# EAGLE board Arm Board (EAGLE 6.5.0), part 1 of 2
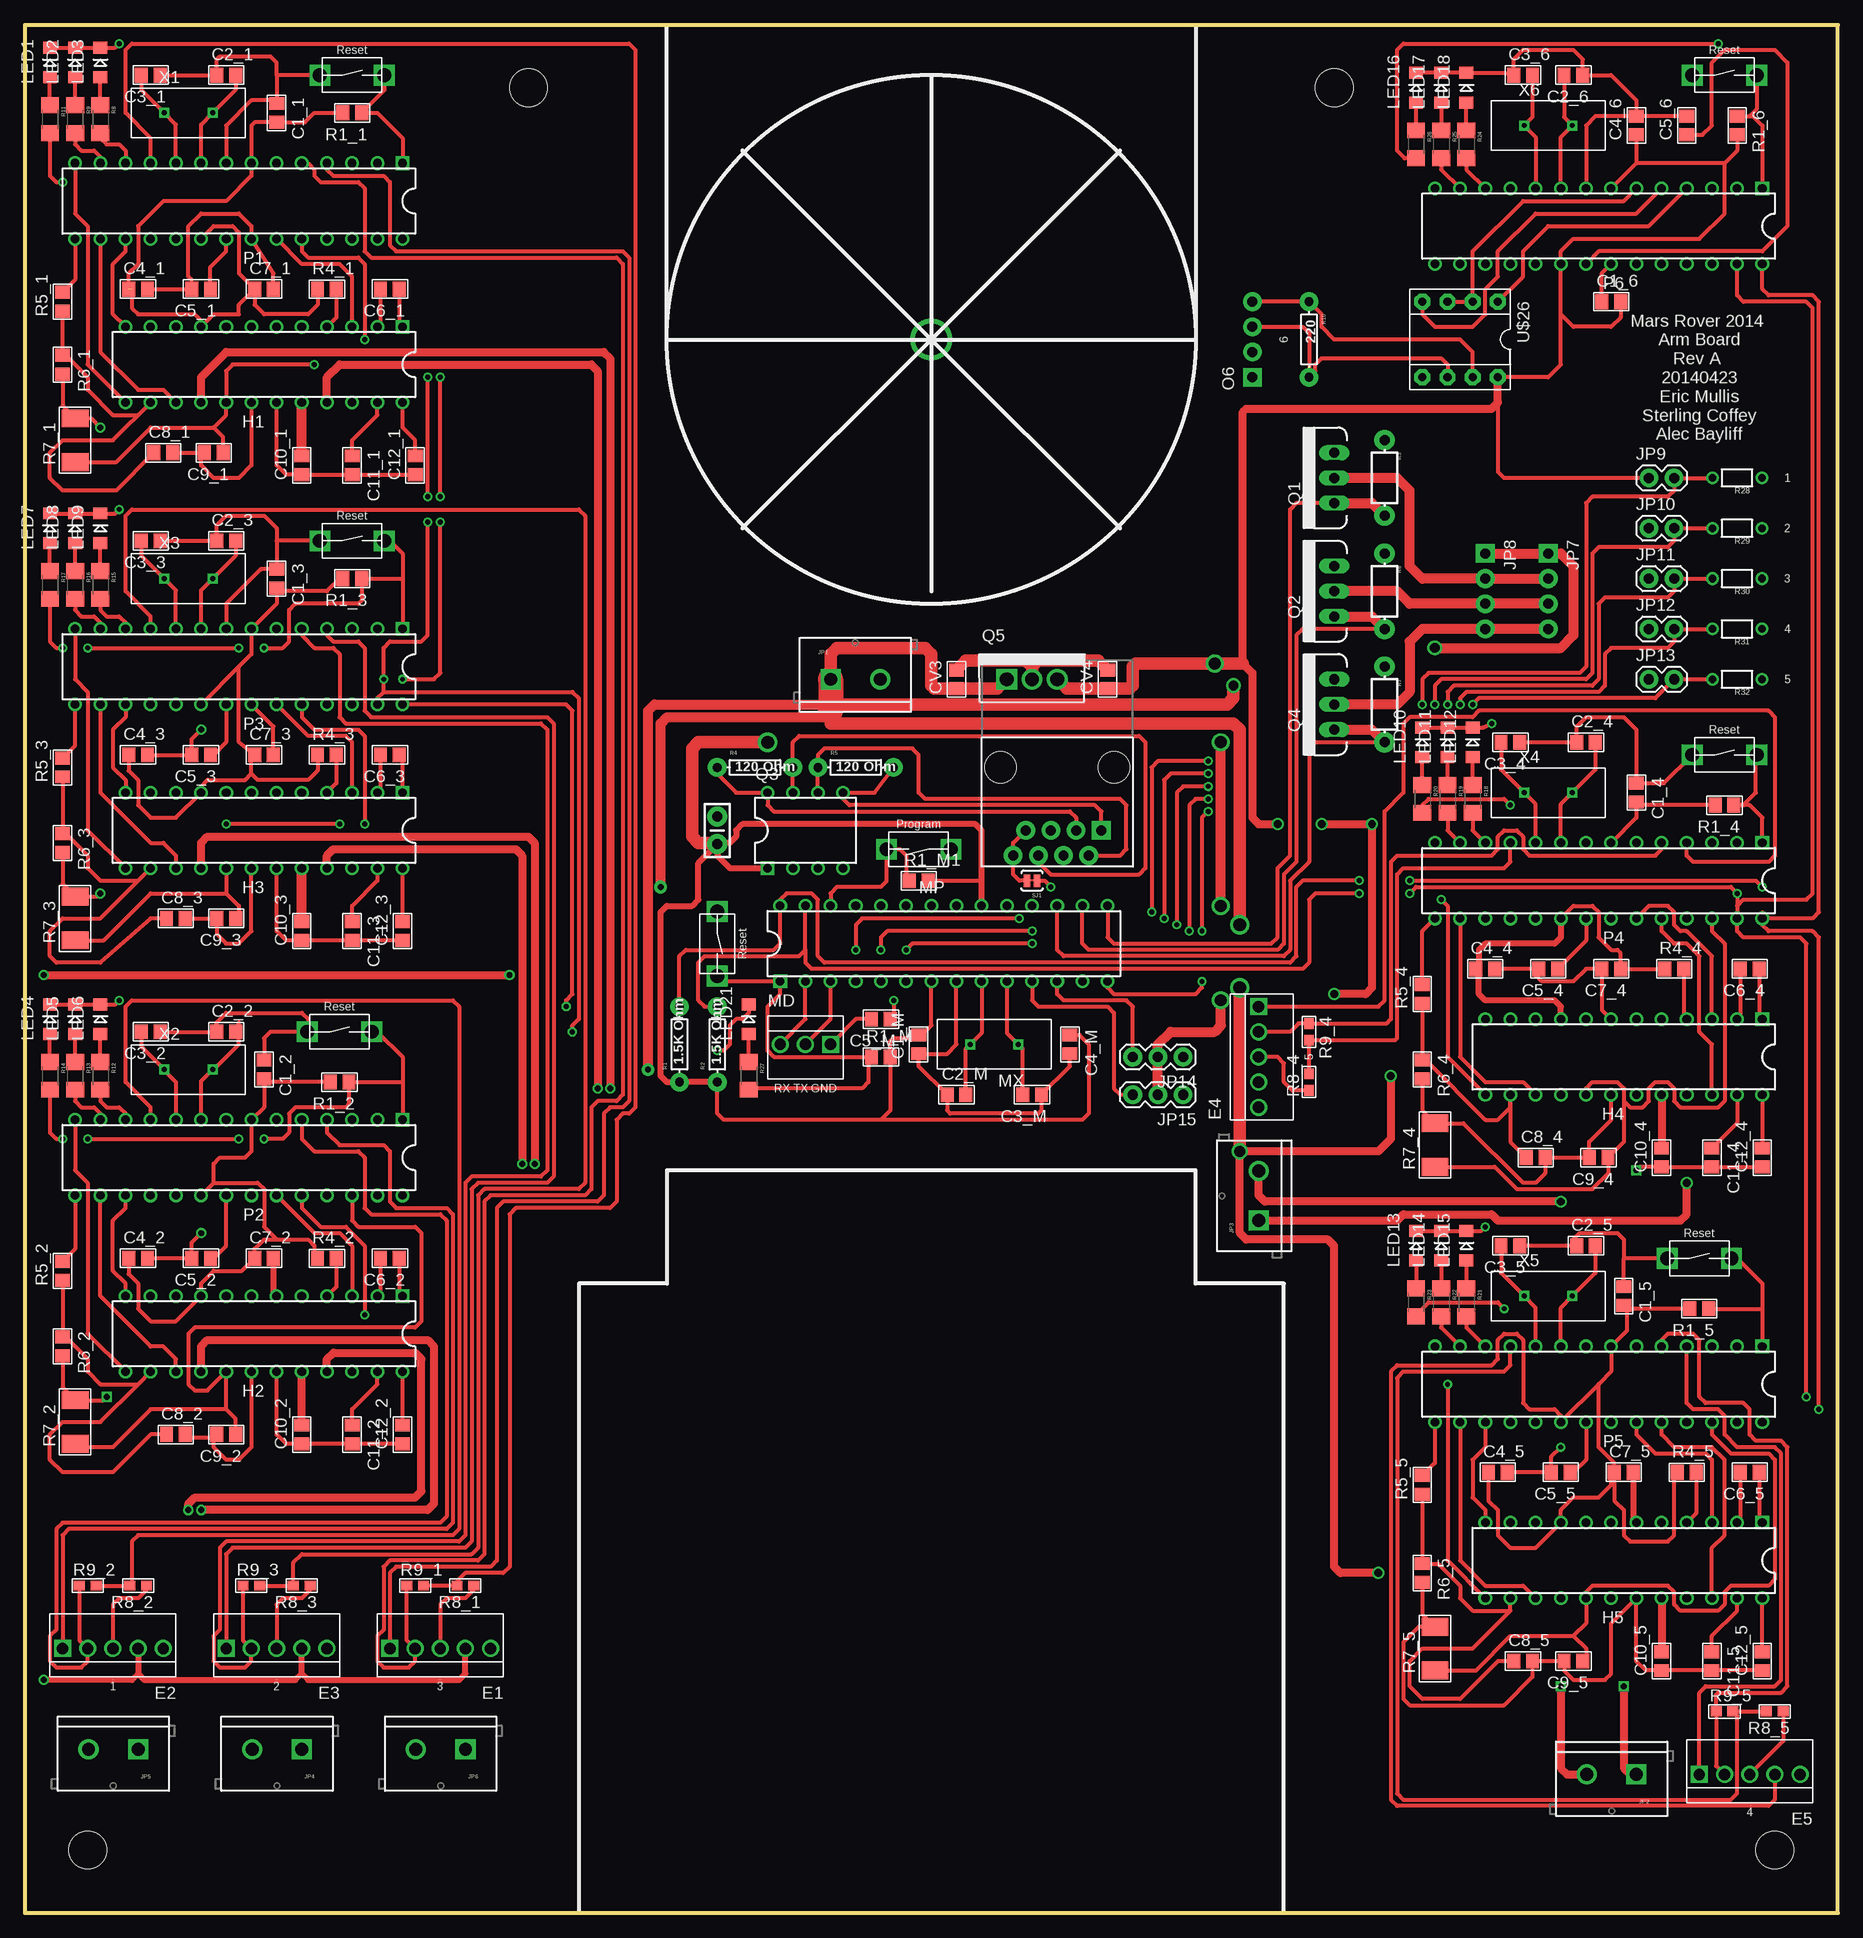
[diagram p0: board, top side]
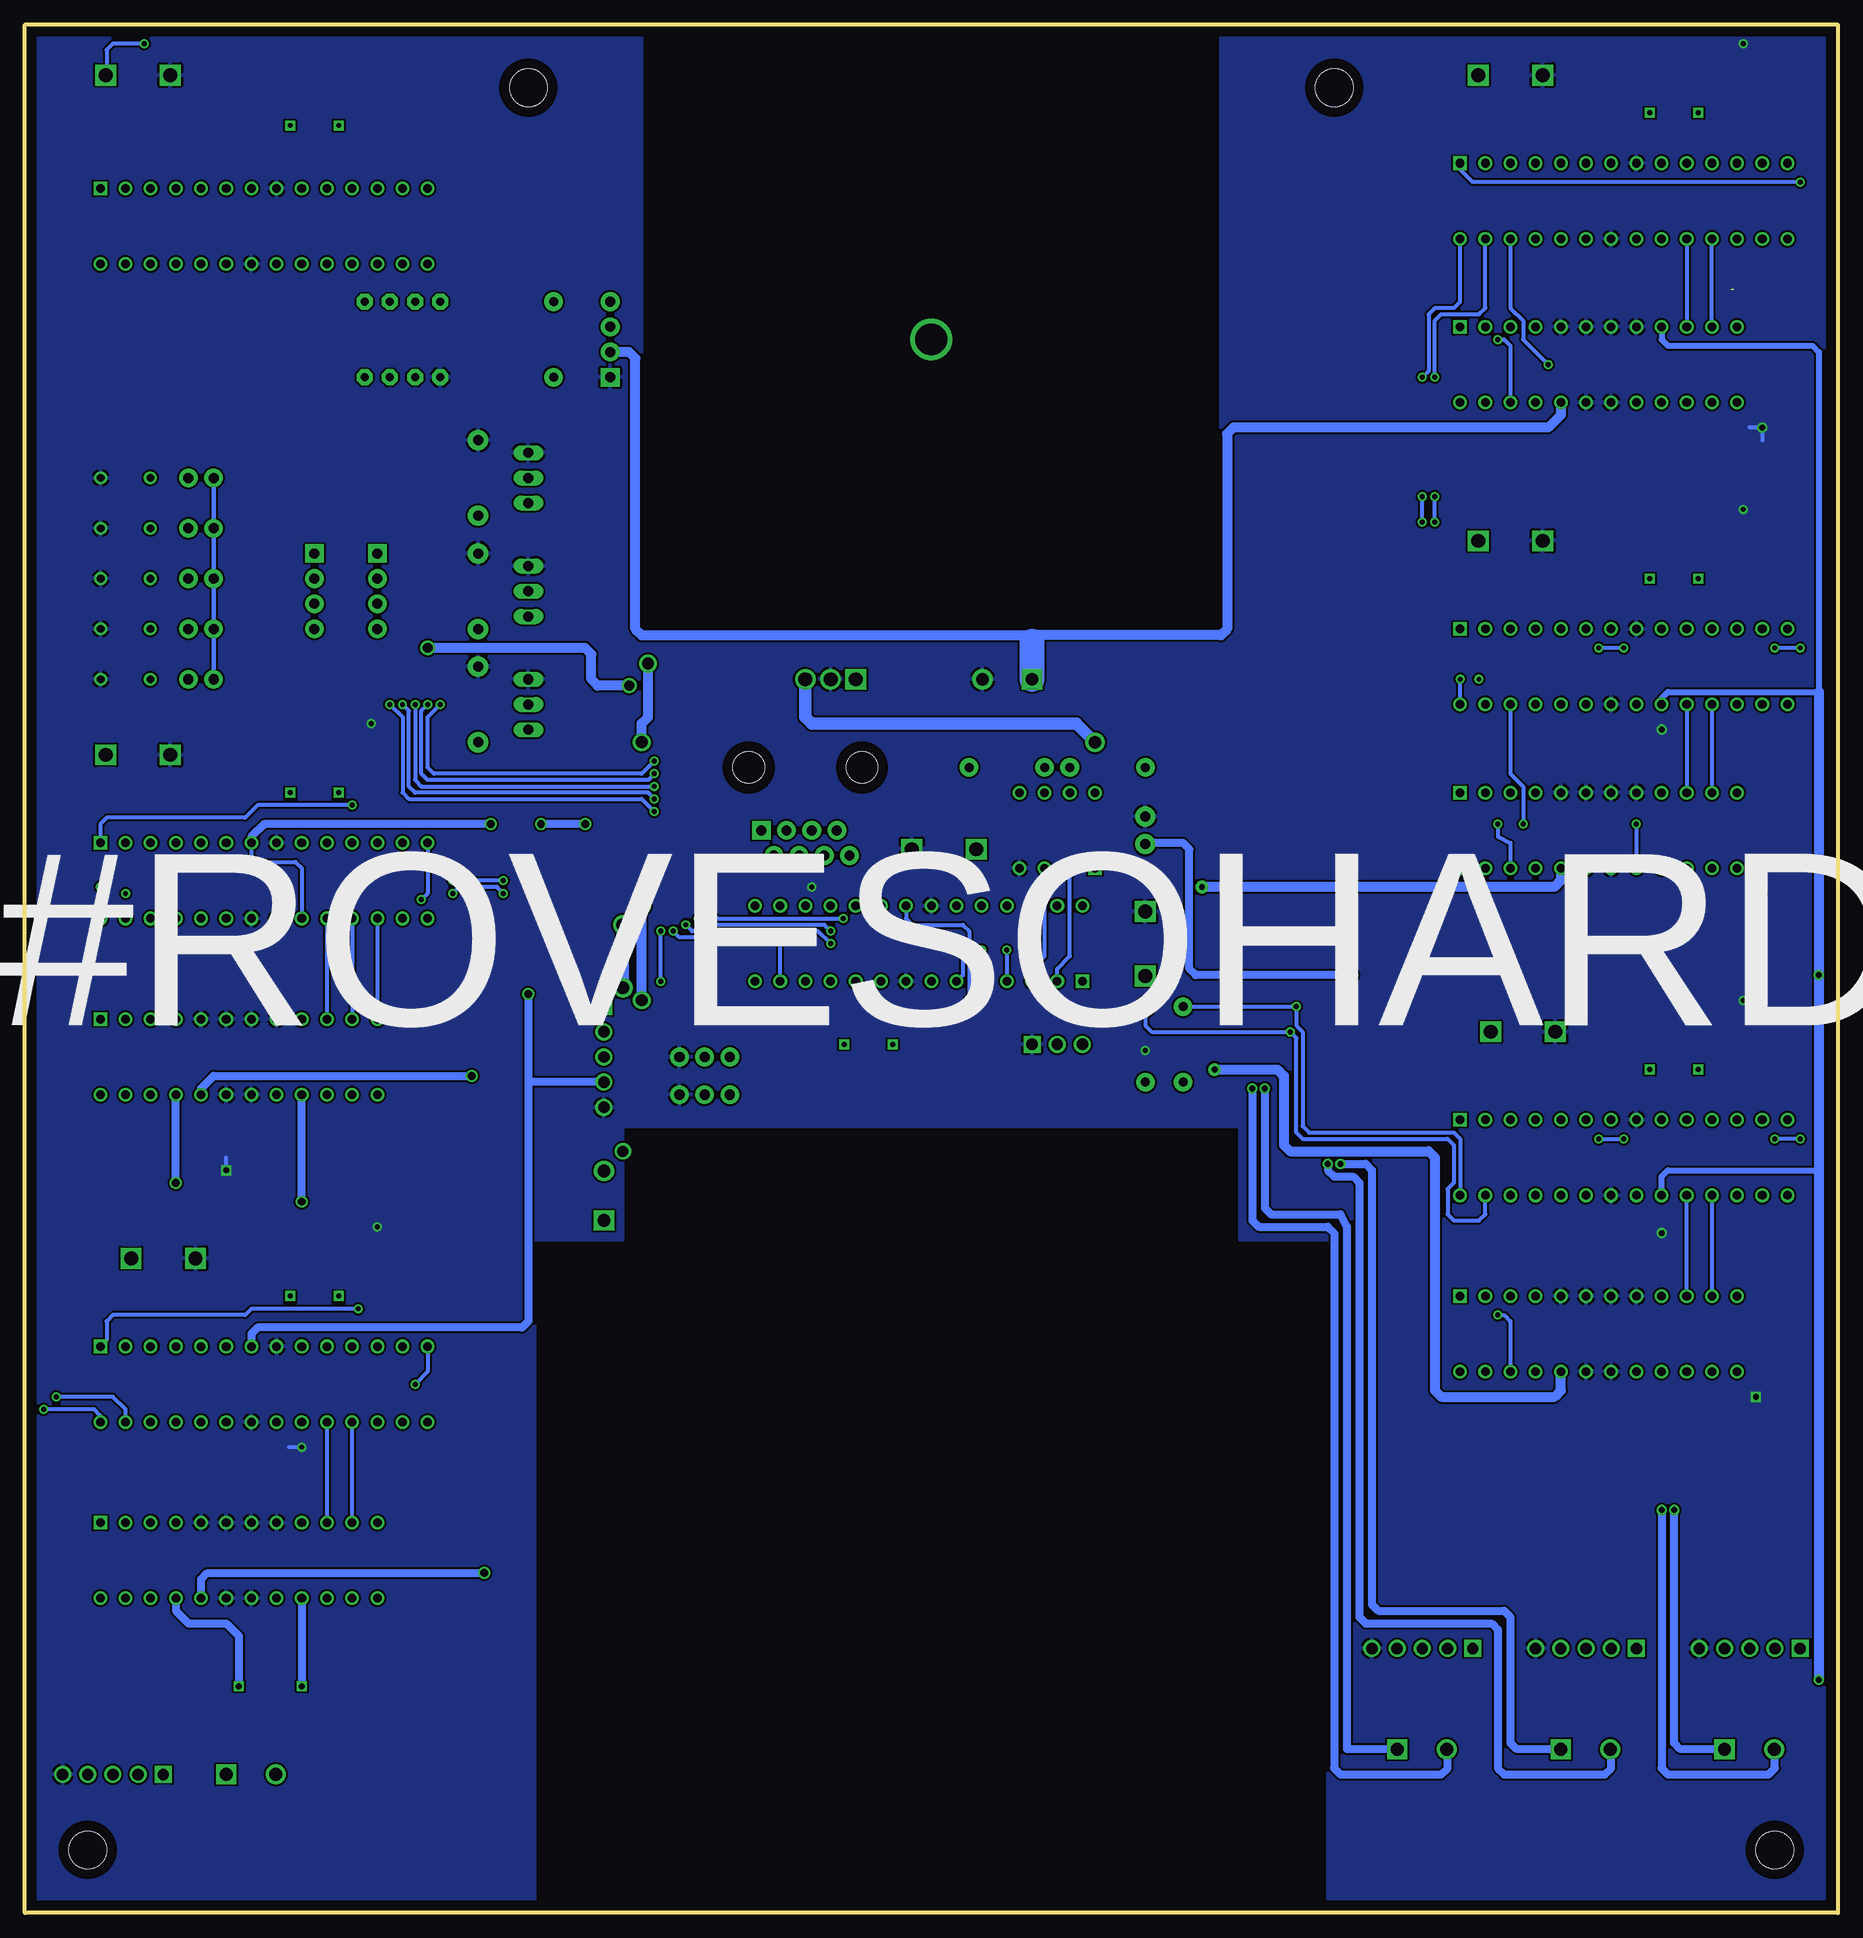
[diagram p1: board, bottom side, seen from below]

Size 182.88 x 190.5 mm. Coordinates in mm from the lower left corner, seen from the top.
Outline: 182.88,0 182.88,190.5 0,190.5 0,0 182.88,0
Copper layers (1*16): Top 0.035mm / dielectric 1.5mm / Bottom 0.035mm
Design rules "default *": minimum track width 10mil, minimum drill 15mil, track to track 8mil, track to pad 8mil, pad to pad 8mil, via to via 8mil, smd to smd 8mil, copper to edge 40mil, drill to drill 8mil, minimum pad ring 10mil, minimum via ring 8mil, stop-mask expansion 4mil, vias tented up to drill 0mil, thermal gap 10mil
Holes 3.81 mm at 50.8,184.15 132.08,184.15 176.53,6.35 6.35,6.35

## Footprints (pad centres in the part's own frame; a part is rotated, then mirrored left to right if it is on the bottom)
C_0805 = smd 1.3 x 1.5: 1 -0.95,0; 2 0.95,0
CAP-PTH-SMALL-KIT = drill 1.016 pad 2.032: 1 -1.397,0; 2 1.397,0
J_MTA100_5P = drill 1.143 square: 1 5.08,0 | drill 1.143: 2 2.54,0; 3 0,0; 4 -2.54,0; 5 -5.08,0
DIP24 = drill 0.864 square: 1 -16.51,-3.81 | drill 0.864: 2 -13.97,-3.81; 3 -11.43,-3.81; 4 -8.89,-3.81; 5 -6.35,-3.81; 6 -3.81,-3.81; 7 -1.27,-3.81; 8 1.27,-3.81; 9 3.81,-3.81; 10 6.35,-3.81; 11 8.89,-3.81; 12 11.43,-3.81; 13 11.43,3.81; 14 8.89,3.81; 15 6.35,3.81; 16 3.81,3.81; 17 1.27,3.81; 18 -1.27,3.81; 19 -3.81,3.81; 20 -6.35,3.81; 21 -8.89,3.81; 22 -11.43,3.81; 23 -13.97,3.81; 24 -16.51,3.81
J_TOGGLE = drill 1.4 square: P$1 -3.25,0; P$2 3.25,0
SCREWTERMINAL-5MM-2 = drill 1.3 pad 2.032 square: 1 0,0 | drill 1.3 pad 2.032: 2 5,0
1X04_NO_SILK = drill 1.016 pad 1.88 square: 1 0,0 | drill 1.016 pad 1.88: 2 2.54,0; 3 5.08,0; 4 7.62,0
1X02 = drill 1.016 pad 1.88: 1 0,0; 2 2.54,0
1X03 = drill 1.016 pad 1.88: 1 0,0; 2 2.54,0; 3 5.08,0
LED-1206 = smd 1.2 x 1.4: A -1.5,0; C 1.5,0
J_MTA100_3P = drill 1.143 square: 1 2.54,0 | drill 1.143: 2 0,0; 3 -2.54,0
DIP28 = drill 0.864 square: 1 -16.51,-3.81 | drill 0.864: 2 -13.97,-3.81; 3 -11.43,-3.81; 4 -8.89,-3.81; 5 -6.35,-3.81; 6 -3.81,-3.81; 7 -1.27,-3.81; 8 1.27,-3.81; 9 3.81,-3.81; 10 6.35,-3.81; 11 8.89,-3.81; 12 11.43,-3.81; 13 13.97,-3.81; 14 16.51,-3.81; 15 16.51,3.81; 16 13.97,3.81; 17 11.43,3.81; 18 8.89,3.81; 19 6.35,3.81; 20 3.81,3.81; 21 1.27,3.81; 22 -1.27,3.81; 23 -3.81,3.81; 24 -6.35,3.81; 25 -8.89,3.81; 26 -11.43,3.81; 27 -13.97,3.81; 28 -16.51,3.81
HC-49 = drill 0.5 square: P$1 -2.44,0; P$2 2.44,0
TO220V = drill 1.016 long: 1 -2.54,0; 2 0,0; 3 2.54,0
DIP8 = drill 0.864 square: 1 -3.81,-3.81 | drill 0.864: 2 -1.27,-3.81; 3 1.27,-3.81; 4 3.81,-3.81; 5 3.81,3.81; 6 1.27,3.81; 7 -1.27,3.81; 8 -3.81,3.81
TO-220 = drill 1.397 square: 1 -2.54,0 | drill 1.397: 2 0,0; 3 2.54,0
AXIAL-0.3 = drill 0.9 pad 1.88: P$1 -3.81,0; P$2 3.81,0
R_0805 = smd 1.3 x 1.5: 1 -0.95,0; 2 0.95,0
AXIAL-0.3-KIT = drill 1.016 pad 2.032: P$1 -3.81,0; P$2 3.81,0
R_2010 = smd 1.8 x 2.7: 1 -2.2,0; 2 2.2,0
1206 = smd 1.6 x 1.8: 1 -1.4,0; 2 1.4,0
R_0603 = smd 1.1 x 1: 1 -0.85,0; 2 0.85,0
AXIAL-0.3EZ = drill 0.9 pad 1.88: P$1 -3.81,0; P$2 3.81,0
1/6W-RES = drill 0.762: 1 -2.5,0; 2 2.5,0
SJ_2S-TRACE = smd 0.635 x 1.27: 1 -0.508,0; 2 0.508,0
RJ45-8 = drill 1 pad 1.88 square: 1 -4.445,6.35 | drill 1 pad 1.88: 2 -3.175,8.89; 3 -1.905,6.35; 4 -0.635,8.89; 5 0.635,6.35; 6 1.905,8.89; 7 3.175,6.35; 8 4.445,8.89 | hole 3.2: -5.715,0; 5.715,0
DIL08 = drill 0.813 pad 1.6 octagon: 1 -3.81,-3.81; 2 -1.27,-3.81; 3 1.27,-3.81; 4 3.81,-3.81; 5 3.81,3.81; 6 1.27,3.81; 7 -1.27,3.81; 8 -3.81,3.81

## Placement (x,y rotation side)
C1_1  [C_0805]  25.4,181.61 270 top
C1_2  [C_0805]  24.13,85.09 270 top
C1_3  [C_0805]  25.4,134.62 270 top
C1_4  [C_0805]  162.56,113.03 270 top
C1_5  [C_0805]  161.29,62.23 270 top
C1_6  [C_0805]  160.02,162.56 0 top
C1_M  [C_0805]  90.17,87.63 90 top
C2_1  15pF  [C_0805]  20.32,185.42 0 top
C2_2  15pF  [C_0805]  20.32,88.9 0 top
C2_3  15pF  [C_0805]  20.32,138.43 0 top
C2_4  15pF  [C_0805]  157.48,118.11 0 top
C2_5  15pF  [C_0805]  157.48,67.31 0 top
C2_6  15pF  [C_0805]  156.21,185.42 180 top
C2_M  15pF  [C_0805]  93.98,82.55 0 top
C3_1  [C_0805]  12.7,185.42 180 top
C3_2  [C_0805]  12.7,88.9 180 top
C3_3  [C_0805]  12.7,138.43 180 top
C3_4  [C_0805]  149.86,118.11 180 top
C3_5  [C_0805]  149.86,67.31 180 top
C3_6  [C_0805]  151.13,185.42 0 top
C3_M  [C_0805]  101.6,82.55 180 top
C4_1  [C_0805]  11.43,163.83 0 top
C4_2  [C_0805]  11.43,66.04 0 top
C4_3  [C_0805]  11.43,116.84 0 top
C4_4  [C_0805]  147.32,95.25 0 top
C4_5  [C_0805]  148.59,44.45 0 top
C4_6  [C_0805]  162.56,180.34 90 top
C4_M  [C_0805]  105.41,87.63 270 top
C5_1  [C_0805]  17.78,163.83 180 top
C5_2  [C_0805]  17.78,66.04 180 top
C5_3  [C_0805]  17.78,116.84 180 top
C5_4  [C_0805]  153.67,95.25 180 top
C5_5  [C_0805]  154.94,44.45 180 top
C5_6  [C_0805]  167.64,180.34 90 top
C5_M  [C_0805]  86.36,90.17 180 top
C6_1  0.22uF  [C_0805]  36.83,163.83 180 top
C6_2  0.22uF  [C_0805]  36.83,66.04 180 top
C6_3  0.22uF  [C_0805]  36.83,116.84 180 top
C6_4  0.22uF  [C_0805]  173.99,95.25 180 top
C6_5  0.22uF  [C_0805]  173.99,44.45 180 top
C7_1  [C_0805]  24.13,163.83 0 top
C7_2  [C_0805]  24.13,66.04 0 top
C7_3  [C_0805]  24.13,116.84 0 top
C7_4  [C_0805]  160.02,95.25 180 top
C7_5  [C_0805]  161.29,44.45 0 top
C8_1  0.1uF  [C_0805]  13.97,147.32 0 top
C8_2  0.1uF  [C_0805]  15.24,48.26 0 top
C8_3  0.1uF  [C_0805]  15.24,100.33 0 top
C8_4  0.1uF  [C_0805]  152.4,76.2 0 top
C8_5  0.1uF  [C_0805]  151.13,25.4 0 top
C9_1  [C_0805]  19.05,147.32 180 top
C9_2  [C_0805]  20.32,48.26 180 top
C9_3  [C_0805]  20.32,100.33 180 top
C9_4  [C_0805]  158.75,76.2 180 top
C9_5  [C_0805]  156.21,25.4 180 top
C10  .1uF  [CAP-PTH-SMALL-KIT]  69.85,109.22 90 top
C10_1  [C_0805]  27.94,146.05 90 top
C10_2  [C_0805]  27.94,48.26 90 top
C10_3  [C_0805]  27.94,99.06 90 top
C10_4  [C_0805]  165.1,76.2 90 top
C10_5  [C_0805]  165.1,25.4 90 top
C11_1  [C_0805]  33.02,146.05 270 top
C11_2  [C_0805]  33.02,48.26 270 top
C11_3  [C_0805]  33.02,99.06 270 top
C11_4  [C_0805]  170.18,76.2 270 top
C11_5  [C_0805]  170.18,25.4 270 top
C12_1  [C_0805]  39.37,146.05 90 top
C12_2  [C_0805]  38.1,48.26 90 top
C12_3  [C_0805]  38.1,99.06 90 top
C12_4  [C_0805]  175.26,76.2 90 top
C12_5  [C_0805]  175.26,25.4 90 top
CV3  [C_0805]  93.98,124.46 90 top
CV4  [C_0805]  109.22,124.46 90 top
E1  [J_MTA100_5P]  41.91,26.67 180 top
E2  [J_MTA100_5P]  8.89,26.67 180 top
E3  [J_MTA100_5P]  25.4,26.67 180 top
E4  [J_MTA100_5P]  124.46,86.36 90 top
E5  [J_MTA100_5P]  173.99,13.97 180 top
H1  A3959  [DIP24]  21.59,156.21 180 top
H2  A3959  [DIP24]  21.59,58.42 180 top
H3  A3959  [DIP24]  21.59,109.22 180 top
H4  A3959  [DIP24]  158.75,86.36 180 top
H5  A3959  [DIP24]  158.75,35.56 180 top
J6  J_MC32857  [J_TOGGLE]  171.45,185.42 0 top
JP1  M025MM  [SCREWTERMINAL-5MM-2]  81.28,124.46 0 top
JP2  M025MM  [SCREWTERMINAL-5MM-2]  162.56,13.97 180 top
JP3  M025MM  [SCREWTERMINAL-5MM-2]  124.46,69.85 90 top
JP4  M025MM  [SCREWTERMINAL-5MM-2]  27.94,16.51 180 top
JP5  M025MM  [SCREWTERMINAL-5MM-2]  11.43,16.51 180 top
JP6  M025MM  [SCREWTERMINAL-5MM-2]  44.45,16.51 180 top
JP7  [1X04_NO_SILK]  153.67,137.16 270 top
JP8  [1X04_NO_SILK]  147.32,137.16 270 top
JP9  M02PTH  [1X02]  163.83,144.78 0 top
JP10  M02PTH  [1X02]  163.83,139.7 0 top
JP11  M02PTH  [1X02]  163.83,134.62 0 top
JP12  M02PTH  [1X02]  163.83,129.54 0 top
JP13  M02PTH  [1X02]  163.83,124.46 0 top
JP14  [1X03]  116.84,86.36 180 top
JP15  [1X03]  116.84,82.55 180 top
LED1  [LED-1206]  2.54,186.69 90 top
LED2  [LED-1206]  5.08,186.69 90 top
LED3  [LED-1206]  7.62,186.69 90 top
LED4  [LED-1206]  2.54,90.17 90 top
LED5  [LED-1206]  5.08,90.17 90 top
LED6  [LED-1206]  7.62,90.17 90 top
LED7  [LED-1206]  2.54,139.7 90 top
LED8  [LED-1206]  5.08,139.7 90 top
LED9  [LED-1206]  7.62,139.7 90 top
LED10  [LED-1206]  140.97,118.11 90 top
LED11  [LED-1206]  143.51,118.11 90 top
LED12  [LED-1206]  146.05,118.11 90 top
LED13  [LED-1206]  140.34,67.31 90 top
LED14  [LED-1206]  142.88,67.31 90 top
LED15  [LED-1206]  145.41,67.31 90 top
LED16  [LED-1206]  140.34,184.15 90 top
LED17  [LED-1206]  142.88,184.15 90 top
LED18  [LED-1206]  145.41,184.15 90 top
LED21  [LED-1206]  73.03,90.17 90 top
MD  [J_MTA100_3P]  78.74,87.63 0 top
MP  ATMEGA328P  [DIP28]  92.71,97.79 0 top
MS  J_MC32857  [J_TOGGLE]  69.85,97.79 270 top
MS1  J_MC32857  [J_TOGGLE]  90.17,107.31 180 top
MX  HC49S  [HC-49]  97.79,87.63 180 top
O6  [1X04_NO_SILK]  123.83,154.94 90 top
P1  ATMEGA328P  [DIP28]  21.59,172.72 180 top
P2  ATMEGA328P  [DIP28]  21.59,76.2 180 top
P3  ATMEGA328P  [DIP28]  21.59,125.73 180 top
P4  ATMEGA328P  [DIP28]  158.75,104.14 180 top
P5  ATMEGA328P  [DIP28]  158.75,53.34 180 top
P6  ATMEGA328P  [DIP28]  158.75,170.18 180 top
Q1  MOSFET-NCHANNELFQP30N06L  [TO220V]  132.08,144.78 90 top
Q2  MOSFET-NCHANNELFQP30N06L  [TO220V]  132.08,133.35 90 top
Q3  Q_LTC490  [DIP8]  78.74,109.22 0 top
Q4  MOSFET-NCHANNELFQP30N06L  [TO220V]  132.08,121.92 90 top
Q5  LDO  [TO-220]  101.6,124.46 0 top
R1  1.5K Ohm  [AXIAL-0.3]  66.04,87.63 90 top
R1_1  200  [R_0805]  33.02,181.61 180 top
R1_2  200  [R_0805]  31.75,83.82 180 top
R1_3  200  [R_0805]  33.02,134.62 180 top
R1_4  200  [R_0805]  171.45,111.76 180 top
R1_5  200  [R_0805]  168.91,60.96 180 top
R1_6  200  [R_0805]  172.72,180.34 270 top
R1_M  200  [R_0805]  86.36,86.36 0 top
R1_M1  200  [R_0805]  90.17,104.14 0 top
R2  1.5K Ohm  [AXIAL-0.3]  69.85,87.63 90 top
R3  [AXIAL-0.3-KIT]  137.16,144.78 270 top
R4  120 Ohm  [AXIAL-0.3]  73.66,115.57 0 top
R4_1  51k  [R_0805]  30.48,163.83 0 top
R4_2  51k  [R_0805]  30.48,66.04 0 top
R4_3  51k  [R_0805]  30.48,116.84 0 top
R4_4  51k  [R_0805]  166.37,95.25 0 top
R4_5  51k  [R_0805]  167.64,44.45 0 top
R5  120 Ohm  [AXIAL-0.3]  83.82,115.57 0 top
R5_1  1k  [R_0805]  3.81,162.56 90 top
R5_2  1k  [R_0805]  3.81,64.77 90 top
R5_3  1k  [R_0805]  3.81,115.57 90 top
R5_4  1k  [R_0805]  140.97,92.71 90 top
R5_5  1k  [R_0805]  140.97,43.18 90 top
R6  [AXIAL-0.3-KIT]  137.16,133.35 270 top
R6_1  10k  [R_0805]  3.81,156.21 270 top
R6_2  10k  [R_0805]  3.81,57.15 270 top
R6_3  10k  [R_0805]  3.81,107.95 270 top
R6_4  10k  [R_0805]  140.97,85.09 270 top
R6_5  10k  [R_0805]  140.97,34.29 270 top
R7  [AXIAL-0.3-KIT]  137.16,121.92 270 top
R7_1  [R_2010]  5.08,148.59 90 top
R7_2  [R_2010]  5.08,49.53 90 top
R7_3  [R_2010]  5.08,100.33 90 top
R7_4  [R_2010]  142.24,77.47 90 top
R7_5  [R_2010]  142.24,26.67 90 top
R8  [1206]  7.62,180.97 270 top
R8_1  [R_0603]  44.45,33.02 180 top
R8_2  [R_0603]  11.43,33.02 180 top
R8_3  [R_0603]  27.94,33.02 180 top
R8_4  [R_0603]  129.54,83.82 90 top
R8_5  [R_0603]  176.53,20.32 180 top
R9  [1206]  5.08,180.97 270 top
R9_1  [R_0603]  39.37,33.02 0 top
R9_2  [R_0603]  6.35,33.02 0 top
R9_3  [R_0603]  22.86,33.02 0 top
R9_4  [R_0603]  129.54,88.9 270 top
R9_5  [R_0603]  171.45,20.32 0 top
R10  220  [AXIAL-0.3EZ]  129.54,158.75 270 top
R11  [1206]  2.54,180.97 270 top
R12  [1206]  7.62,84.45 270 top
R13  [1206]  5.08,84.45 270 top
R14  [1206]  2.54,84.45 270 top
R15  [1206]  7.62,133.99 270 top
R16  [1206]  5.08,133.99 270 top
R17  [1206]  2.54,133.99 270 top
R18  [1206]  146.05,112.39 270 top
R19  [1206]  143.51,112.39 270 top
R20  [1206]  140.97,112.39 270 top
R21  [1206]  145.41,61.59 270 top
R22  [1206]  142.88,61.59 270 top
R23  [1206]  140.34,61.59 270 top
R24  [1206]  145.41,178.44 270 top
R25  [1206]  142.88,178.44 270 top
R26  [1206]  140.34,178.44 270 top
R27  [1206]  73.03,84.45 270 top
R28  [1/6W-RES]  172.72,144.78 180 top
R29  [1/6W-RES]  172.72,139.7 180 top
R30  [1/6W-RES]  172.72,134.62 180 top
R31  [1/6W-RES]  172.72,129.54 180 top
R32  [1/6W-RES]  172.72,124.46 180 top
S1  J_MC32857  [J_TOGGLE]  33.02,185.42 0 top
S2  J_MC32857  [J_TOGGLE]  31.75,88.9 0 top
S3  J_MC32857  [J_TOGGLE]  33.02,138.43 0 top
S4  J_MC32857  [J_TOGGLE]  171.45,116.84 0 top
S5  J_MC32857  [J_TOGGLE]  168.91,66.04 0 top
SJ1  SOLDERJUMPERTRACE  [SJ_2S-TRACE]  101.6,104.14 180 top
U$2  RJ45-8PTH  [RJ45-8]  104.14,115.57 180 top
U$26  MAX485DIL  [DIL08]  144.78,158.75 180 top
X1  HC49S  [HC-49]  16.51,181.61 0 top
X2  HC49S  [HC-49]  16.51,85.09 0 top
X3  HC49S  [HC-49]  16.51,134.62 0 top
X4  HC49S  [HC-49]  153.67,113.03 0 top
X5  HC49S  [HC-49]  153.67,62.23 0 top
X6  HC49S  [HC-49]  153.67,180.34 0 top

## Library data of the parts
C1_1-C1_6 C1_M C2_1-C2_6 C2_M C3_1-C3_6 C3_M C4_1-C4_6 C4_M C5_1-C5_6 C5_M C6_1-C6_5 C7_1-C7_5 C8_1-C8_5 C9_1-C9_5 C10_1-C10_5 C11_1-C11_5 C12_1-C12_5 CV3 CV4 R1_1-R1_6 R1_M R1_M1 R4_1-R4_5 R5_1-R5_5 R6_1-R6_5 R7_1-R7_5 R8_1-R8_5 R9_1-R9_5 = Lib_Passive
C10 = SparkFun-Capacitors
E1-E5 MD = Lib_TH
H1-H5 J6 MP MS MS1 MX P1-P6 Q3 Q5 S1-S5 X1-X6 = PCB0M1
JP1-JP15 O6 U$2 = SparkFun-Connectors
LED1-LED18 LED21 = LilyPad-Wearables
Q1 Q2 Q4 = SparkFun-DiscreteSemi; PROD_ID: TRANS-10060
R1 R2 R4 R5 R8-R32 SJ1 = SparkFun-Passives
R3 R6 R7 = SparkFun-Resistors; PROD_ID: RES-08375
U$26 = SparkFun-DigitalIC

## Nets
B1: JP9.2 MP.4 R28.2
B2: JP10.2 MP.5 R29.2
B3: JP11.2 MP.6 R30.2
B4: JP12.2 MP.13 R31.2
B5: JP13.2 MP.14 R32.2
BLANK1: H1.12 P1.17
BLANK2: H2.12 P2.17
BLANK3: H3.12 P3.17
BLANK4: H4.12 P4.17
BLANK5: H5.12 P5.17
D1: P1.3
D2: P2.3
D3: P3.3
D4: P4.3
D5: P5.3
D7: P6.3
D+: O6.3 R10.P$2 U$26.6
D-: O6.4 R10.P$1 U$26.7
DIR6: P6.6 U$26.2 U$26.3
DM: MD.2 MP.3 Q3.3
EN1: H1.10 P1.19
EN2: H2.10 P2.19
EN3: H3.10 P3.19
EN4: H4.10 P4.19
EN5: H5.10 P5.19
EXTMODE1: H1.15 P1.16
EXTMODE2: H2.15 P2.16
EXTMODE3: H3.15 P3.16
EXTMODE4: H4.15 P4.16
EXTMODE5: H5.15 P5.16
GND: C1_1.1 C1_2.1 C1_3.1 C1_4.1 C1_5.1 C1_6.1 C1_M.1 C2_1.1 C2_2.1 C2_3.1 C2_4.1 C2_5.1 C2_6.1 C2_M.1 C3_1.1 C3_2.1 C3_3.1 C3_4.1 C3_5.1 C3_6.1 C3_M.1 C4_1.2 C4_2.2 C4_3.2 C4_4.2 C4_5.2 C4_6.2 C4_M.2 C5_1.2 C5_2.2 C5_3.2 C5_4.2 C5_5.2 C5_6.2 C5_M.2 C7_1.2 C7_2.2 C7_3.2 C7_4.2 C7_5.2 C8_1.2 C8_2.2 C8_3.2 C8_4.2 C8_5.2 C9_1.2 C9_2.2 C9_3.2 C9_4.2 C9_5.2 C10.2 C10_1.1 C10_2.1 C10_3.1 C10_4.1 C10_5.1 C11_1.2 C11_2.2 C11_3.2 C11_4.2 C11_5.2 C12_1.1 C12_2.1 C12_3.1 C12_4.1 C12_5.1 CV3.2 CV4.2 E1.5 E2.5 E3.5 E4.5 E5.5 H1.5 H1.6 H1.7 H1.8 H1.18 H1.19 H2.5 H2.6 H2.7 H2.8 H2.18 H2.19 H3.5 H3.6 H3.7 H3.8 H3.18 H3.19 H4.5 H4.6 H4.7 H4.8 H4.18 H4.19 H5.5 H5.6 H5.7 H5.8 H5.18 H5.19 J6.P$1 JP1.2 JP14.1 JP15.1 LED1.C LED2.C LED3.C LED4.C LED5.C LED6.C LED7.C LED8.C LED9.C LED10.C LED11.C LED12.C LED13.C LED14.C LED15.C LED16.C LED17.C LED18.C LED21.C MD.1 MP.8 MP.22 MS1.P$1 MS.P$1 O6.1 P1.8 P1.22 P2.8 P2.22 P3.8 P3.22 P4.8 P4.22 P5.8 P5.22 P6.8 P6.22 Q1.3 Q2.3 Q3.4 Q4.3 Q5.2 R3.P$1 R6.P$1 R6_1.2 R6_2.2 R6_3.2 R6_4.2 R6_5.2 R7.P$1 R7_1.2 R7_2.2 R7_3.2 R7_4.2 R7_5.2 R28.1 R29.1 R30.1 R31.1 R32.1 S1.P$1 S2.P$1 S3.P$1 S4.P$1 S5.P$1 SJ1.1 U$26.5
INTERRUPT1_1: E1.2 P1.5 R9_1.1
INTERRUPT1_2: E2.2 P2.5 R9_2.1
INTERRUPT1_3: E3.2 P3.5 R9_3.1
INTERRUPT1_4: E4.2 P4.5 R9_4.1
INTERRUPT1_5: E5.2 P5.5 R9_5.1
INTERRUPT2_1: E1.1 P1.4
INTERRUPT2_2: E2.1 P2.4
INTERRUPT2_3: E3.1 P3.4
INTERRUPT2_4: E4.1 P4.4
INTERRUPT2_5: E5.1 P5.4
ISENSE1: C9_1.1 H1.17 P1.26 R7_1.1
ISENSE2: C9_2.1 H2.17 P2.26 R7_2.1
ISENSE3: C9_3.1 H3.17 P3.26 R7_3.1
ISENSE4: C9_4.1 H4.17 P4.26 R7_4.1
ISENSE5: C9_5.1 H5.17 P5.26 R7_5.1
LED1_1: P1.12 R8.2
LED1_2: P2.12 R12.2
LED1_3: P3.12 R15.2
LED1_4: P4.12 R18.2
LED1_5: P5.12 R21.2
LED1_6: P6.12 R24.2
LED2_1: P1.13 R9.2
LED2_2: P2.13 R13.2
LED2_3: P3.13 R16.2
LED2_4: P4.13 R19.2
LED2_5: P5.13 R22.2
LED2_6: P6.13 R25.2
N$2: Q3.8 R4.P$1 U$2.3
N$3: LED3.A R8.1
N$4: LED2.A R9.1
N$5: Q3.5 R5.P$2 U$2.1
N$6: LED1.A R11.1
N$7: LED6.A R12.1
N$8: SJ1.2 U$2.7 U$2.8
N$9: Q3.6 R5.P$1 U$2.2
N$10: Q3.7 R4.P$2 U$2.6
N$11: C3_1.2 P1.10 X1.P$1
N$12: C2_1.2 P1.9 X1.P$2
N$13: LED5.A R13.1
N$14: C5_1.1 P1.21
N$15: P1.1 R1_1.1 R11.2 S1.P$2
N$16: C6_1.1 H1.1
N$17: C6_1.2 H1.2
N$18: H1.4 R4_1.2
N$19: LED4.A R14.1
N$20: C12_1.2 H1.24
N$21: LED9.A R15.1
N$22: C11_1.1 H1.23
N$23: LED8.A R16.1
N$24: LED7.A R17.1
N$25: LED12.A R18.1
N$26: E1.3 R8_1.1
N$27: C3_2.2 P2.10 X2.P$1
N$28: C2_2.2 P2.9 X2.P$2
N$29: C5_2.1 P2.21
N$30: P2.1 R1_2.1 R14.2 S2.P$2
N$31: C6_2.1 H2.1
N$32: C6_2.2 H2.2
N$33: H2.4 R4_2.2
N$34: C12_2.2 H2.24
N$35: C11_2.1 H2.23
N$36: LED11.A R19.1
N$37: LED10.A R20.1
N$38: LED15.A R21.1
N$39: E2.3 R8_2.1
N$40: C3_3.2 P3.10 X3.P$1
N$41: C2_3.2 P3.9 X3.P$2
N$42: C5_3.1 P3.21
N$43: P3.1 R1_3.1 R17.2 S3.P$2
N$44: C6_3.1 H3.1
N$45: C6_3.2 H3.2
N$46: H3.4 R4_3.2
N$47: C12_3.2 H3.24
N$48: C11_3.1 H3.23
N$49: LED14.A R22.1
N$50: LED13.A R23.1
N$51: LED18.A R24.1
N$52: E3.3 R8_3.1
N$53: C3_4.2 P4.10 X4.P$1
N$54: C2_4.2 P4.9 X4.P$2
N$55: C5_4.1 P4.21
N$56: P4.1 R1_4.1 R20.2 S4.P$2
N$57: C6_4.1 H4.1
N$58: C6_4.2 H4.2
N$59: H4.4 R4_4.2
N$60: C12_4.2 H4.24
N$61: C11_4.1 H4.23
N$62: LED17.A R25.1
N$63: LED16.A R26.1
N$64: LED21.A R27.1
N$65: E4.3 R8_4.1
N$66: C3_5.2 P5.10 X5.P$1
N$67: C2_5.2 P5.9 X5.P$2
N$68: C5_5.1 P5.21
N$69: P5.1 R1_5.1 R23.2 S5.P$2
N$70: C6_5.1 H5.1
N$71: C6_5.2 H5.2
N$72: H5.4 R4_5.2
N$73: C12_5.2 H5.24
N$74: C11_5.1 H5.23
N$75: MP.26 MS1.P$2 R1_M1.1
N$78: E5.3 R8_5.1
N$79: C3_6.2 P6.10 X6.P$1
N$80: C2_6.2 P6.9 X6.P$2
N$81: C5_6.1 P6.21
N$85: C3_M.2 MP.10 MX.P$1
N$86: C2_M.2 MP.9 MX.P$2
N$87: C5_M.1 MP.21
N$88: MP.1 MS.P$2 R1_M.1 R27.2
O1: JP7.2 JP8.2 Q1.2
O2: JP7.3 JP8.3 Q2.2
O3: JP7.4 JP8.4 Q4.2
OUTA1: H1.16 JP6.2
OUTA2: H2.16 JP5.2
OUTA3: H3.16 JP4.2
OUTA4: H4.16 JP3.2
OUTA5: H5.16 JP2.2
OUTB1: H1.21 JP6.1
OUTB2: H2.21 JP5.1
OUTB3: H3.21 JP4.1
OUTB4: H4.21 JP3.1
OUTB5: H5.21 JP2.1
PFD1_1: H1.13 P1.14
PFD1_2: H2.13 P2.14
PFD1_3: H3.13 P3.14
PFD1_4: H4.13 P4.14
PFD1_5: H5.13 P5.14
PFD2_1: H1.11 P1.18
PFD2_2: H2.11 P2.18
PFD2_3: H3.11 P3.18
PFD2_4: H4.11 P4.18
PFD2_5: H5.11 P5.18
PHASE1: H1.3 P1.23
PHASE2: H2.3 P2.23
PHASE3: H3.3 P3.23
PHASE4: H4.3 P4.23
PHASE5: H5.3 P5.23
PULSE1: P1.11 R8_1.2 R9_1.2
PULSE2: P2.11 R8_2.2 R9_2.2
PULSE3: P3.11 R8_3.2 R9_3.2
PULSE4: P4.11 R8_4.2 R9_4.2
PULSE5: P5.11 R8_5.2 R9_5.2
PWM1: JP15.3 MP.11
PWM2: JP14.3 MP.12
R1: P1.2
R2: P2.2
R3: P3.2
R4: P4.2
R5: P5.2
R7: P6.2
REF1: C8_1.1 H1.14 R5_1.1 R6_1.1
REF1_1: P1.15 R5_1.2
REF1_2: P2.15 R5_2.2
REF1_3: P3.15 R5_3.2
REF1_4: P4.15 R5_4.2
REF1_5: P5.15 R5_5.2
REF2: C8_2.1 H2.14 R5_2.1 R6_2.1
REF3: C8_3.1 H3.14 R5_3.1 R6_3.1
REF4: C8_4.1 H4.14 R5_4.1 R6_4.1
REF5: C8_5.1 H5.14 R5_5.1 R6_5.1
RM: MD.3 MP.2 Q3.2
S1: MP.15 Q1.1 R3.P$2
S2: MP.16 Q2.1 R6.P$2
S3: MP.17 Q4.1 R7.P$2
S6: J6.P$2 P6.1 R1_6.1 R26.2
SCL: MP.28 P1.28 P2.28 P3.28 P4.28 P5.28 P6.28 R1.P$2
SD6: P6.5 U$26.4
SDA: MP.27 P1.27 P2.27 P3.27 P4.27 P5.27 P6.27 R2.P$2
SLEEP1_1: H1.22 P1.24
SLEEP1_2: H2.22 P2.24
SLEEP1_3: H3.22 P3.24
SLEEP1_4: H4.22 P4.24
SLEEP1_5: H5.22 P5.24
SR6: P6.4 U$26.1
V5: C1_1.2 C1_2.2 C1_3.2 C1_4.2 C1_5.2 C1_6.2 C1_M.2 C4_1.1 C4_2.1 C4_3.1 C4_4.1 C4_5.1 C4_6.1 C4_M.1 C7_1.1 C7_2.1 C7_3.1 C7_4.1 C7_5.1 C10.1 CV4.1 E1.4 E2.4 E3.4 E4.4 E5.4 H1.9 H2.9 H3.9 H4.9 H5.9 JP9.1 JP10.1 JP11.1 JP12.1 JP13.1 JP14.2 JP15.2 MP.7 MP.20 P1.7 P1.20 P2.7 P2.20 P3.7 P3.20 P4.7 P4.20 P5.7 P5.20 P6.7 P6.20 Q3.1 Q5.3 R1.P$1 R1_1.2 R1_2.2 R1_3.2 R1_4.2 R1_5.2 R1_6.2 R1_M1.2 R1_M.2 R2.P$1 R4_1.1 R4_2.1 R4_3.1 R4_4.1 R4_5.1 U$26.8
VIN: C10_1.2 C10_2.2 C10_3.2 C10_4.2 C10_5.2 CV3.1 H1.20 H2.20 H3.20 H4.20 H5.20 JP1.1 JP7.1 JP8.1 O6.2 Q5.1